# Altium PCB Slider_v2.PcbDoc
Units mm, origin at the board's own origin, x right, y up, seen from the top; angles counter-clockwise.
Board outline 50.99 x 50.99 mm, 2 copper layers (Top Layer, Bottom Layer); 17 components, 16 nets, 32 pads, 0 vias.
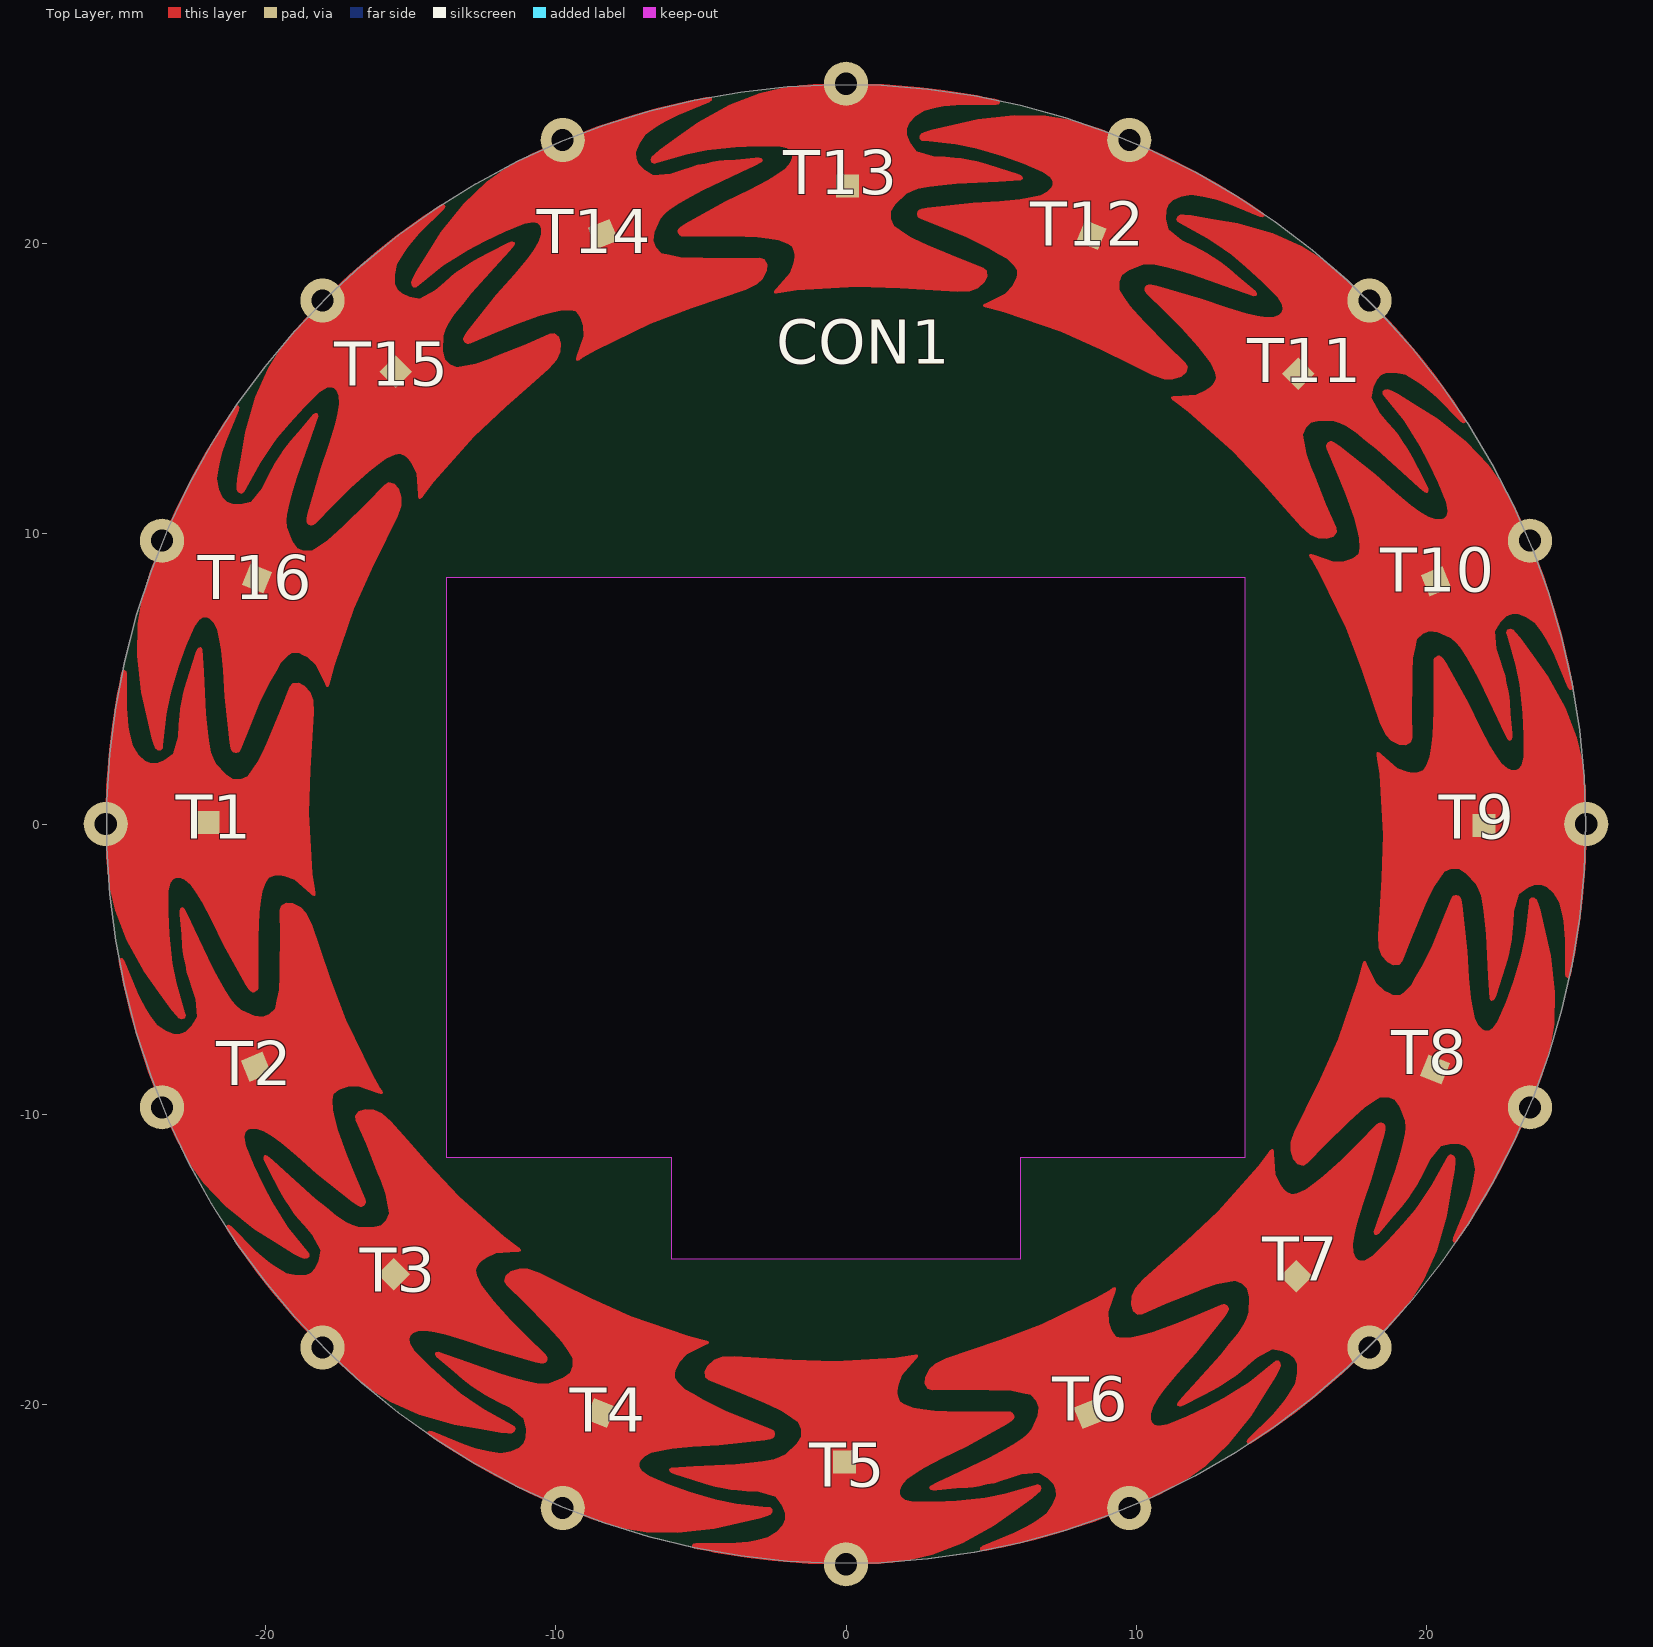
[diagram p0: Top Layer view]
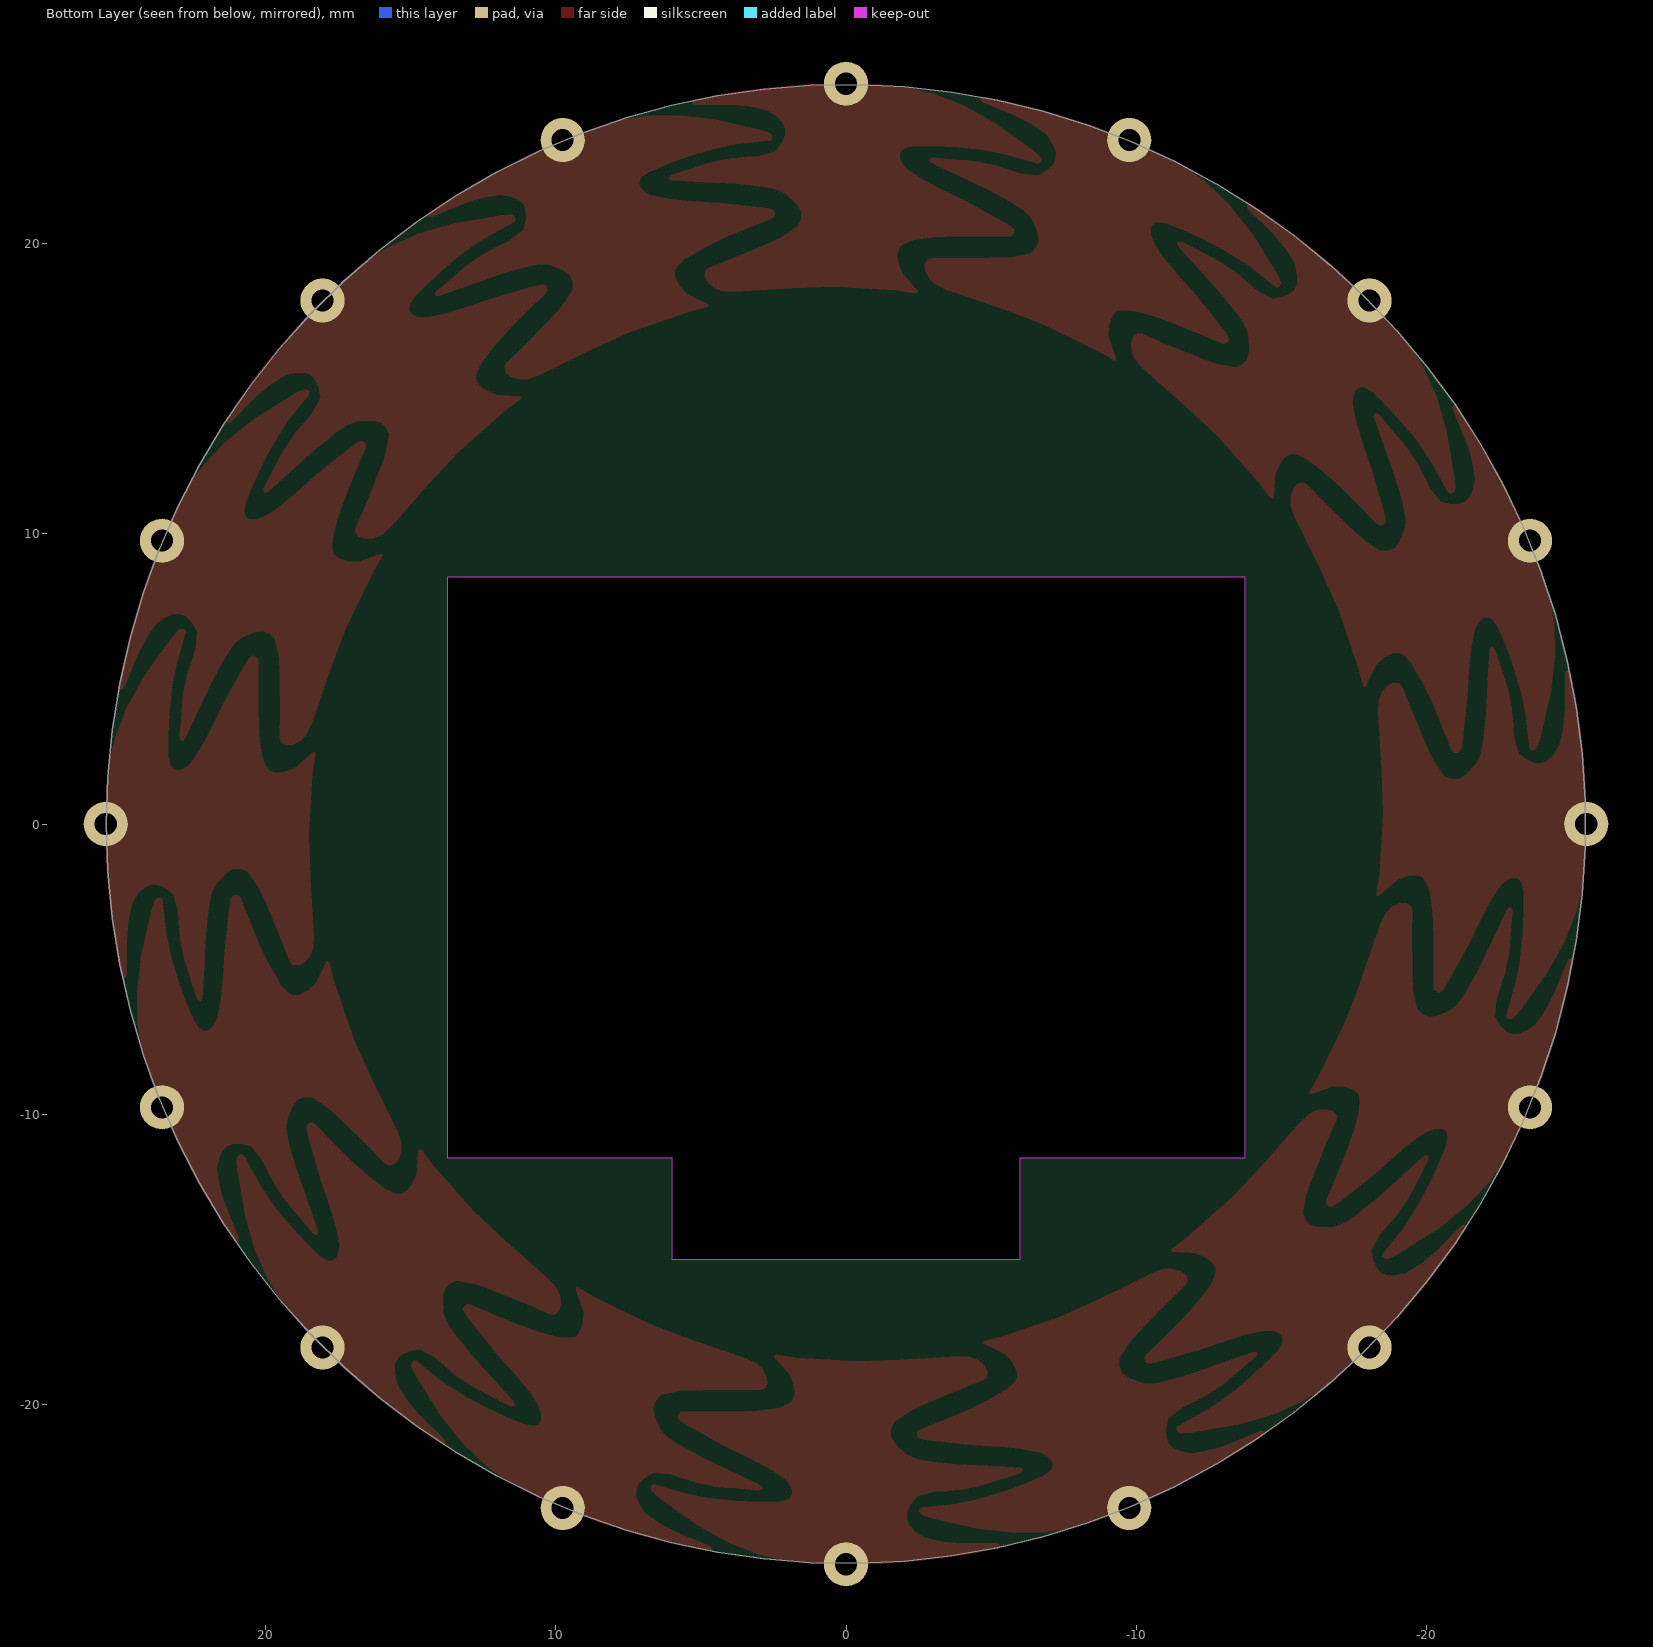
[diagram p1: Bottom Layer view, seen from below]

## Layer stack, top to bottom
Top Solder: solder mask 0.0102, Solder Resist, Dk 3.5
Top Layer: signal copper 0.0356
Dielectric 1: dielectric 0.32, FR-4, Dk 4.8
Bottom Layer: signal copper 0.0356
Bottom Solder: solder mask 0.0102, Solder Resist, Dk 3.5

## Board outline
25.5,0 25.449,1.617 25.295,3.228 25.039,4.826 24.683,6.404 24.227,7.957 23.673,9.477 23.025,10.96 22.283,12.398 21.452,13.786 20.534,15.119 19.534,16.391 18.455,17.597 17.302,18.732 16.079,19.792 14.791,20.772 13.444,21.668 12.043,22.477 10.593,23.196 9.101,23.821 7.571,24.35 6.012,24.781 4.428,25.113 2.826,25.343 1.213,25.471 -0.405,25.497 -2.021,25.42 -3.629,25.24 -5.223,24.959 -6.795,24.578 -8.34,24.098 -9.852,23.52 -11.324,22.848 -12.75,22.084 -14.125,21.231 -15.443,20.292 -16.699,19.272 -17.888,18.174 -19.004,17.003 -20.044,15.763 -21.004,14.46 -21.879,13.099 -22.665,11.685 -23.361,10.224 -23.962,8.722 -24.467,7.184 -24.873,5.618 -25.18,4.029 -25.385,2.424 -25.487,0.809 -25.487,-0.809 -25.385,-2.424 -25.18,-4.029 -24.873,-5.618 -24.467,-7.184 -23.962,-8.722 -23.361,-10.224 -22.665,-11.685 -21.879,-13.099 -21.004,-14.46 -20.044,-15.763 -19.004,-17.003 -17.888,-18.174 -16.699,-19.272 -15.443,-20.292 -14.125,-21.231 -12.75,-22.084 -11.324,-22.848 -9.852,-23.52 -8.34,-24.098 -6.795,-24.578 -5.223,-24.959 -3.629,-25.24 -2.021,-25.42 -0.405,-25.497 1.213,-25.471 2.826,-25.343 4.428,-25.113 6.012,-24.781 7.571,-24.35 9.101,-23.821 10.593,-23.196 12.043,-22.477 13.444,-21.668 14.791,-20.772 16.079,-19.792 17.302,-18.732 18.455,-17.597 19.534,-16.391 20.534,-15.119 21.452,-13.786 22.283,-12.398 23.025,-10.96 23.673,-9.477 24.227,-7.957 24.683,-6.404 25.039,-4.826 25.295,-3.228 25.449,-1.617
cut-out: -13.775,8.5 13.75,8.5 13.75,-11.5 6,-11.5 6,-15 -6,-15 -6,-11.5 -13.775,-11.5

## Design rules (kind name [scope] priority, off if disabled: settings)
Clearance [All] p1: gap=0.254
PolygonConnect [All] p1: connectstyle=Relief reliefconductorwidth=0.254 reliefentries=4 polygonreliefangle="90 Angle" airgapwidth=0.254
RoutingVias [All] p1: holewidth=0.711 width=1.27 viastyle="Through Hole" minholewidth=0.711 minwidth=1.27 maxholewidth=0.711 maxwidth=1.27
SolderMaskExpansion [All] p1: expansion=0.102
Width [All] p1: maxlimit=0.254 minlimit=0.254 preferedwidth=0.254
29 further rules are at their usual default settings.

## Components (designator, comment, footprint, x,y, rotation, side; value= is the part's Value field where it differs from the comment)
CON1 "RoundSensorCon" RoundSensorCon 0,0 r135 top
T1 "Touch" TOUCH 0,0 r90 top
T2 "Touch" TOUCH 0,0 r112.5 top
T3 "Touch" TOUCH 0,0 r135 top
T4 "Touch" TOUCH 0,0 r157.5 top
T5 "Touch" TOUCH 0,0 r180 top
T6 "Touch" TOUCH 0,0 r202.5 top
T7 "Touch" TOUCH 0,0 r225 top
T8 "Touch" TOUCH 0,0 r247.5 top
T9 "Touch" TOUCH 0,0 r270 top
T10 "Touch" TOUCH 0,0 r292.5 top
T11 "Touch" TOUCH 0,0 r315 top
T12 "Touch" TOUCH 0,0 r337.5 top
T13 "Touch" TOUCH 0,0 r0 top
T14 "Touch" TOUCH 0,0 r22.5 top
T15 "Touch" TOUCH 0,0 r45 top
T16 "Touch" TOUCH 0,0 r67.5 top

## Footprints (in the part's own frame and the unit in brackets; to place one, negate y for a bottom-side part, rotate by r counter-clockwise, add the part's x,y. Pads: shape width x height; smd on the part's side, far side on the other; paste and mask are expansions set on the pad)
RoundSensorCon [mil]
  round 60 hole 30: 1(710.64,710.64) 2(384.6,928.5) 3(0,1005) 4(-384.6,928.5) 5(-710.64,710.64) 6(-928.5,384.6) 7(-1005,0) 8(-928.5,-384.6) 9(-710.64,-710.64) 10(-384.6,-928.5) 11(0,-1005) 12(384.6,-928.5) 13(710.64,-710.64) 14(928.5,-384.6) 15(1005,0) 16(928.5,384.6)
  Top Layer lines w0.39: -368.99,922.03 -384.6,928.5
TOUCH [mm]
  rect 0.8x0.8 smd paste+0 mask+0: 1(0.05,22)
  Top Layer region: -2.25,25.375 -1.675,25.45 -1.125,25.5 -0.225,25.525 0.5,25.525 1.3,25.5 2.55,25.4 3.4,25.3 4.075,25.2 4.525,25.125 4.79,25.066 5.125,25 5.25,24.975 5.3,24.925 5.3,24.875 5.275,24.825 5.175,24.8 4,24.8 3.575,24.775 3.35,24.75 3.1,24.7 2.7,24.6 2.386,24.4 2.175,24.175 2.1,23.975 2.1,23.775 2.2,23.5 2.425,23.2 3,23.025 3.425,23 3.725,22.975 3.975,22.95 4.225,22.9 4.5,22.85 4.7,22.8 4.875,22.75 5.25,22.625 5.9,22.425 6.025,22.375 6.075,22.325 6.1,22.275 6.1,22.25 6.075,22.225 6.025,22.2 5.775,22.175 5.25,22.15 3.8,22.075 3.325,22.025 2.875,21.975 2.475,21.9 2.275,21.825 2.075,21.725 1.7,21.375 1.55,21.125 1.55,20.875 1.65,20.625 1.875,20.475 2.2,20.25 2.625,20.05 2.9,19.925 3.9,19.5 4.725,19.175 4.85,19.075 4.875,18.875 4.775,18.675 4.55,18.475 4.275,18.375 3.85,18.35 3,18.4 1.875,18.475 0.37,18.522 -1.711,18.4 -2.25,18.325 -2.375,18.3 -2.45,18.3 -2.475,18.325 -2.475,18.35 -2.45,18.4 -2.4,18.45 -1.925,19 -1.8,19.35 -1.775,19.55 -1.775,19.65 -1.8,19.775 -1.85,19.9 -2,20 -2.325,20.125 -2.65,20.175 -3.05,20.225 -3.9,20.275 -4.725,20.275 -5.606,20.262 -5.675,20.275 -5.725,20.3 -5.775,20.35 -5.8,20.4 -5.8,20.475 -5.775,20.525 -5.7,20.6 -5.55,20.7 -4.15,21.475 -3.325,21.875 -2.7,22.2 -2.375,22.4 -2.1,22.6 -1.925,22.8 -1.85,22.975 -1.85,23.1 -1.9,23.2 -2.025,23.3 -2.321,23.372 -3.05,23.375 -3.821,23.334 -4.475,23.275 -4.8,23.225 -5.475,23.1 -6.5,22.8 -6.6,22.775 -6.7,22.8 -6.725,22.9 -6.7,23 -6.6,23.1 -6.425,23.25 -5.8,23.7 -5.1,24.2 -4,24.8 -2.975,25.2

## Nets (pads, with @x,y where several pads share a name; then routed paths per layer and width w, separated by ;. In a path a pad name is that pad's centre, name@x,y a point inside that pad or via, vN(x,y) a via of type N, cw(c..) or ccw(c..) an arc to the next point about the centre after c; other vN are vias at no path point)
NetCON1_1: CON1.1 T1.1
NetCON1_2: CON1.2 T2.1
NetCON1_3: CON1.3 T3.1
NetCON1_4: CON1.4 T4.1
NetCON1_5: CON1.5 T5.1
NetCON1_6: CON1.6 T6.1
NetCON1_7: CON1.7 T7.1
NetCON1_8: CON1.8 T8.1
NetCON1_9: CON1.9 T9.1
NetCON1_10: CON1.10 T10.1
NetCON1_11: CON1.11 T11.1
NetCON1_12: CON1.12 T12.1
NetCON1_13: CON1.13 T13.1
NetCON1_14: CON1.14 T14.1
NetCON1_15: CON1.15 T15.1
NetCON1_16: CON1.16 T16.1

## Silkscreen, mask and mechanical layers (free items; w line width, h text height)
Mechanical 1:
  circle w0.254: c0,0 r25.5
  lines w0.1: -13.775,-11.5 -13.775,8.5 13.75,8.5 13.75,-11.5 6,-11.5 6,-15 -6,-15 -6,-11.5 -13.775,-11.5